# Altium PCB PlanerInductor.PcbDoc (part 2 of 2)
Units mil, origin at the board's own origin, x right, y up, seen from the top; angles counter-clockwise.
Board outline 3000 x 3000 mil, 4 copper layers (Top Layer, Mid-Layer 1, Mid-Layer 2, Bottom Layer); 105 components, 0 nets, 210 pads, 66 vias.
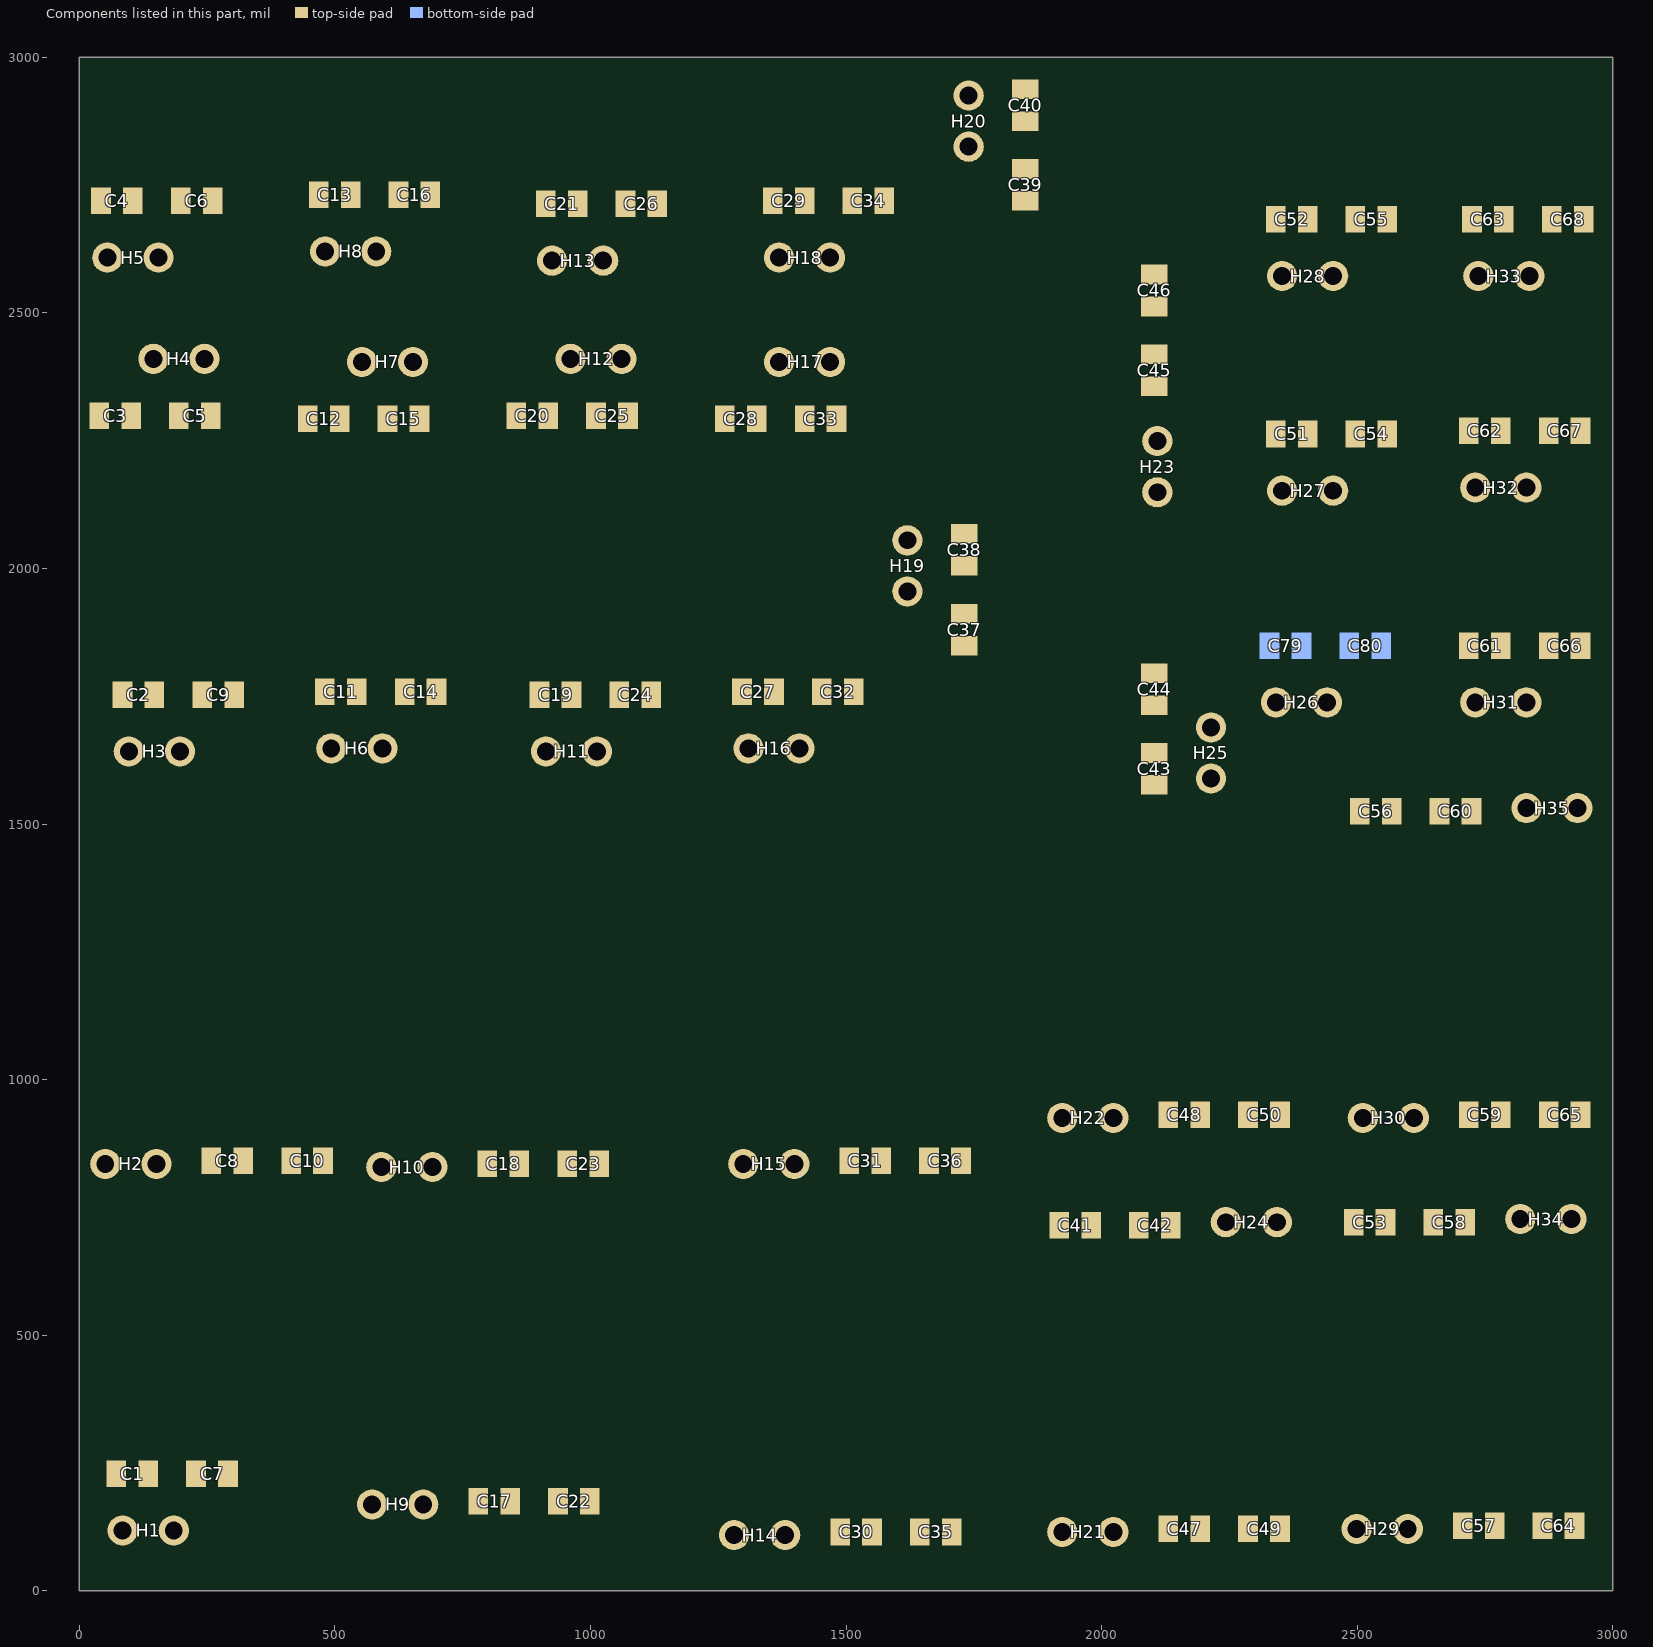
[diagram p4: the components of this part, seen from the top]

## Via types
v1: diameter 25, hole 8, Top Layer to Bottom Layer, 66 vias

## Nets (pads, with @x,y where several pads share a name; then routed paths per layer and width w, separated by ;. In a path a pad name is that pad's centre, name@x,y a point inside that pad or via, vN(x,y) a via of type N, cw(c..) or ccw(c..) an arc to the next point about the centre after c; other vN are vias at no path point) (continued)
copper on no net: | length 670792.9
  Top Layer w6: 27,283 27,313 27,631 345,631 345,313 39,313 39,619 333,619 333,325 51,325 51,607 321,607 321,337 63,337 63,595 309,595 309,349 75,349 75,583 297,583 297,361 87,361 87,571 285,571 285,373 99,373 99,559 273,559 273,385 111,385 111,403 v1(129,403) ; 27,289 27,275 37,265 171,265 177,271 ; v1@234,1096 234,1069 393,1069 393,1285 177,1285 177,1057 405,1057 405,1297 165,1297 165,1045 417,1045 417,1309 153,1309 153,1033 429,1033 429,1321 141,1321 141,1021 441,1021 441,1333 129,1333 129,1009 453,1009 453,1345 117,1345 117,997 465,997 465,1357 105,1357 105,985 477,985 477,1369 93,1369 93,973 489,973 489,1381 81,1381 81,961 501,961 501,1393 69,1393 69,937 117,889 273,889 321,841 ; v1@753,1098 753,1069 915,1069 915,1285 699,1285 699,1057 927,1057 927,1297 687,1297 687,1045 939,1045 939,1309 675,1309 675,1033 951,1033 951,1321 663,1321 663,1021 963,1021 963,1333 651,1333 651,1009 975,1009 975,1345 639,1345 639,997 987,997 987,1357 627,1357 627,985 999,985 999,1369 615,1369 615,973 1011,973 1011,1381 603,1381 603,961 1023,961 1023,1393 591,1393 591,961 591,919 627,883 813,883 861,835 ; v1(785,421) 759,421 759,397 837,397 837,487 747,487 747,385 849,385 849,499 735,499 735,373 861,373 861,511 723,511 723,361 873,361 873,523 711,523 711,349 885,349 885,535 699,535 699,337 897,337 897,547 687,547 687,325 909,325 909,559 675,559 675,313 921,313 921,571 663,571 663,301 933,301 933,583 651,583 651,289 945,289 945,595 639,595 639,277 957,277 957,607 627,607 627,265 969,265 969,619 615,619 615,253 981,253 981,631 603,631 603,625 603,253 603,217 615,205 637,205 645,205 657,217 801,217 843,175 ; v1(1455,336) 1455,307 1611,307 1611,523 1395,523 1395,295 1623,295 1623,535 1383,535 1383,283 1635,283 1635,547 1371,547 1371,271 1647,271 1647,559 1359,559 1359,259 1659,259 1659,571 1347,571 1347,247 1671,247 1671,583 1335,583 1335,235 1683,235 1683,595 1323,595 1323,223 1695,223 1695,607 1311,607 1311,211 1707,211 1707,619 1299,619 1299,199 1719,199 1719,631 1287,631 1287,199 1287,160 1298,149 1535,149 1551,133 1551,115 ; v1@1465,1097 1465,1069 1617,1069 1617,1285 1401,1285 1401,1057 1629,1057 1629,1297 1389,1297 1389,1045 1641,1045 1641,1309 1377,1309 1377,1033 1653,1033 1653,1321 1365,1321 1365,1021 1665,1021 1665,1333 1353,1333 1353,1009 1677,1009 1677,1345 1341,1345 1341,997 1689,997 1689,1357 1329,1357 1329,985 1701,985 1701,1369 1317,1369 1317,973 1713,973 1713,1381 1305,1381 1305,961 1725,961 1725,1393 1293,1393 1293,961 1293,913 1317,889 1533,889 1569,853 1569,841 ; v1(2073,661) 2073,715 2073,697 ; v1(2105,342) 2105,313 2253,313 2253,529 2037,529 2037,301 2265,301 2265,541 2025,541 2025,289 2277,289 2277,553 2013,553 2013,277 2289,277 2289,565 2001,565 2001,265 2301,265 2301,577 1989,577 1989,253 2313,253 2313,589 1977,589 1977,241 2325,241 2325,601 1965,601 1965,229 2337,229 2337,613 1953,613 1953,217 2349,217 2349,625 1941,625 1941,205 2361,205 2361,637 1929,637 1929,205 1929,181 1947,163 2169,163 2193,139 2193,121 ; v1(2649,667) 2649,721 2649,703 ; v1@2655,352 2655,319 2829,319 2829,535 2613,535 2613,307 2841,307 2841,547 2601,547 2601,295 2853,295 2853,559 2589,559 2589,283 2865,283 2865,571 2577,571 2577,271 2877,271 2877,583 2565,583 2565,259 2889,259 2889,595 2553,595 2553,247 2901,247 2901,607 2541,607 2541,235 2913,235 2913,619 2529,619 2529,223 2925,223 2925,631 2517,631 2517,211 2937,211 2937,643 2505,643 2505,211 2505,187 2523,169 2745,169 2769,145 2769,127 ; v1(2661,1471) 2661,1525 2661,1507 ; v1@2749,1201 2769,1201 2769,1267 2697,1267 2697,1183 2781,1183 2781,1279 2685,1279 2685,1171 2793,1171 2793,1291 2673,1291 2673,1159 2805,1159 2805,1303 2661,1303 2661,1147 2817,1147 2817,1315 2649,1315 2649,1309 2649,1135 2829,1135 2829,1327 2637,1327 2637,1123 2667,1123 2841,1123 2841,1339 2625,1339 2625,1111 2853,1111 2853,1351 2613,1351 2613,1099 2865,1099 2865,1363 2601,1363 2601,1087 2877,1087 2877,1375 2589,1375 2589,1075 2889,1075 2889,1387 2577,1387 2577,1063 2901,1063 2901,1399 2565,1399 2565,1051 2913,1051 2913,1411 2553,1411 2553,1039 2925,1039 2925,1423 2541,1423 2541,1027 2937,1027 2937,1435 2529,1435 2529,1015 2949,1015 2949,1447 2517,1447 2517,1015 2517,991 2535,973 2757,973 2781,949 2781,931
  Top Layer w7: 39,2299 39,2281.5 72,2248.5 ; 42.5,2719 55,2706.5 55,2608 ; 51,835 111,775 225,775 348.5,775 414.5,841 ; 84.5,1753 97,1740.5 97,1642 ; 85,118 72.5,130.5 72.5,229 85,216.5 ; 101.5,2299 101.5,2366.5 145,2410 130,2425 ; 105,2719 135,2719 185.5,2769.5 228,2769.5 ; v1@116,2869 115,2858 115,2843 88,2843 88,2857 88,2892 172,2892 172,2829 74,2829 74,2906 186,2906 186,2815 60,2815 60,2920 200,2920 200,2801 46,2801 46,2934 214,2934 214,2787 32,2787 32,2948 172,2948 221,2948 228,2948 228,2785 228,2769.5 ; 135,229 177,271 273,271 291,253 291,229 291,246.5 ; 147,1753 177,1753 227.5,1803.5 270,1803.5 ; 151,835 252.5,835 258.5,841 271,828.5 ; v1(151,1898) 151,1877 130,1877 130,1891 130,1926 214,1926 214,1863 116,1863 116,1940 228,1940 228,1849 102,1849 102,1954 242,1954 242,1835 88,1835 88,1968 256,1968 256,1821 74,1821 74,1982 214,1982 263,1982 270,1982 270,1819 270,1803.5 ; 170,2593 155,2608 198.5,2651.5 198.5,2719 ; v1(191,2154) 191,2175 212,2175 212,2161 212,2126 128,2126 128,2189 226,2189 226,2112 114,2112 114,2203 240,2203 240,2098 100,2098 100,2217 254,2217 254,2084 86,2084 86,2231 268,2231 268,2070 128,2070 79,2070 72,2070 72,2233 72,2248.5 ; 195,2299 165,2299 114.5,2248.5 72,2248.5 ; 200,103 185,118 228.5,161.5 228.5,229 ; 212,1627 197,1642 240.5,1685.5 240.5,1753 ; 245,2410 245,2311.5 257.5,2299 ; 261,2719 261,2736.5 228,2769.5 ; 303,1753 303,1770.5 270,1803.5 ; 321,841 351,841 393,883 447,883 ; 434,2300.5 477,2257.5 477,2245 ; 447,2275.5 447,2293 ; 448,881.5 490,839.5 ; 468.5,2731 481,2718.5 481,2620 ; 477,841 477,858.5 ; 480.5,1759 493,1746.5 493,1648 ; 509.5,2293 509.5,2360.5 553,2404 538,2419 ; 531,2731 561,2731 603,2773 657,2773 657,2830 657,2954 650,2954 601,2954 461,2954 461,2793 643,2793 643,2940 475,2940 475,2807 629,2807 629,2926 489,2926 489,2821 615,2821 615,2912 503,2912 503,2835 601,2835 601,2898 517,2898 517,2863 517,2849 538,2849 v1(538,2870) ; 543,1759 573,1759 621,1807 669,1807 ; v1@550,1898 550,1877 529,1877 529,1891 529,1926 613,1926 613,1863 515,1863 515,1940 627,1940 627,1849 501,1849 501,1954 641,1954 641,1835 487,1835 487,1968 655,1968 655,1821 473,1821 473,1982 613,1982 662,1982 669,1982 669,1858 669,1807 ; 573,169 633,109 747,109 870.5,109 936.5,175 ; 591,829 651,769 765,769 888.5,769 954.5,835 ; v1(596,2154) 596,2175 617,2175 617,2161 617,2126 533,2126 533,2189 631,2189 631,2112 519,2112 519,2203 645,2203 645,2098 505,2098 505,2217 659,2217 659,2084 491,2084 491,2231 673,2231 673,2070 533,2070 484,2070 477,2070 477,2194 477,2245 ; 596,2605 581,2620 624.5,2663.5 624.5,2731 ; 603,2293 573,2293 525,2245 477,2245 ; 608,1633 593,1648 636.5,1691.5 636.5,1759 ; 653,2404 653,2305.5 665.5,2293 ; 658,2765.5 700,2723.5 ; 673,169 774.5,169 780.5,175 793,162.5 ; 687,2731 687,2748.5 ; 691,829 792.5,829 798.5,835 811,822.5 ; 699,1759 699,1776.5 ; 712,1751.5 669,1794.5 669,1807 ; 843,175 873,175 915,217 969,217 ; 855,2299 855,2281.5 888,2248.5 ; 861,835 891,835 933,877 987,877 ; 900.5,1753 913,1740.5 913,1642 ; 912.5,2713 925,2700.5 925,2602 ; 917.5,2299 917.5,2366.5 961,2410 946,2425 ; 963,1753 993,1753 1043.5,1803.5 1086,1803.5 ; v1(967,1898) 967,1877 946,1877 946,1891 946,1926 1030,1926 1030,1863 932,1863 932,1940 1044,1940 1044,1849 918,1849 918,1954 1058,1954 1058,1835 904,1835 904,1968 1072,1968 1072,1821 890,1821 890,1982 1030,1982 1079,1982 1086,1982 1086,1819 1086,1803.5 ; 970,215.5 1012,173.5 ; 975,2713 1005,2713 1055.5,2763.5 1098,2763.5 ; 988,875.5 1030,833.5 ; v1(988,2858) 988,2837 958,2837 958,2851 958,2886 1042,2886 1042,2823 944,2823 944,2900 1056,2900 1056,2809 930,2809 930,2914 1070,2914 1070,2795 916,2795 916,2928 1084,2928 1084,2781 902,2781 902,2942 1042,2942 1091,2942 1098,2942 1098,2779 1098,2763.5 ; 999,175 999,192.5 ; v1(1007,2154) 1007,2175 1028,2175 1028,2161 1028,2126 944,2126 944,2189 1042,2189 1042,2112 930,2112 930,2203 1056,2203 1056,2098 916,2098 916,2217 1070,2217 1070,2084 902,2084 902,2231 1084,2231 1084,2070 944,2070 895,2070 888,2070 888,2233 888,2248.5 ; 1011,2299 981,2299 930.5,2248.5 888,2248.5 ; 1017,835 1017,852.5 ; 1028,1627 1013,1642 1056.5,1685.5 1056.5,1753 ; 1040,2587 1025,2602 1068.5,2645.5 1068.5,2713 ; 1061,2410 1061,2311.5 1073.5,2299 ; 1119,1753 1119,1770.5 1086,1803.5 ; 1131,2713 1131,2730.5 1098,2763.5 ; 1250,2300.5 1293,2257.5 1293,2245 ; 1263,2275.5 1263,2293 ; 1281,109 1341,49 1455,49 1578.5,49 1644.5,115 ; 1296.5,1759 1309,1746.5 1309,1648 ; 1299,835 1359,775 1473,775 1596.5,775 1662.5,841 ; 1325.5,2293 1325.5,2360.5 1369,2404 1354,2419 ; 1356.5,2719 1369,2706.5 1369,2608 ; 1359,1759 1389,1759 1437,1807 1485,1807 ; v1@1366,1898 1366,1877 1345,1877 1345,1891 1345,1926 1429,1926 1429,1863 1331,1863 1331,1940 1443,1940 1443,1849 1317,1849 1317,1954 1457,1954 1457,1835 1303,1835 1303,1968 1471,1968 1471,1821 1289,1821 1289,1982 1429,1982 1478,1982 1485,1982 1485,1858 1485,1807 ; 1381,109 1482.5,109 1488.5,115 1501,102.5 ; 1399,835 1500.5,835 1506.5,841 1519,828.5 ; v1(1412,2154) 1412,2175 1433,2175 1433,2161 1433,2126 1349,2126 1349,2189 1447,2189 1447,2112 1335,2112 1335,2203 1461,2203 1461,2098 1321,2098 1321,2217 1475,2217 1475,2084 1307,2084 1307,2231 1489,2231 1489,2070 1349,2070 1300,2070 1293,2070 1293,2194 1293,2245 ; 1419,2293 1389,2293 1341,2245 1293,2245 ; 1419,2719 1449,2719 1497,2767 1545,2767 ; 1424,1633 1409,1648 1452.5,1691.5 1452.5,1759 ; v1(1426,2858) 1426,2837 1405,2837 1405,2851 1405,2886 1489,2886 1489,2823 1391,2823 1391,2900 1503,2900 1503,2809 1377,2809 1377,2914 1517,2914 1517,2795 1363,2795 1363,2928 1531,2928 1531,2781 1349,2781 1349,2942 1489,2942 1538,2942 1545,2942 1545,2818 1545,2767 ; 1469,2404 1469,2305.5 1481.5,2293 ; 1484,2593 1469,2608 1512.5,2651.5 1512.5,2719 ; 1515,1759 1515,1776.5 ; 1528,1751.5 1485,1794.5 1485,1807 ; 1551,115 1581,115 1623,157 1677,157 ; 1569,841 1599,841 1641,883 1695,883 ; 1575,2719 1575,2736.5 ; 1588,2711.5 1545,2754.5 1545,2767 ; 1605,1940 1620,1955 1663.5,1911.5 1731,1911.5 ; 1620,2055 1718.5,2055 1731,2067.5 ; 1678,155.5 1720,113.5 ; 1696,881.5 1738,839.5 ; 1707,115 1707,132.5 ; 1725,841 1725,858.5 ; 1725,2810 1740,2825 1783.5,2781.5 1851,2781.5 ; 1731,1849 1748.5,1849 1781.5,1882 ; 1731,2005 1731,1975 1781.5,1924.5 1781.5,1882 ; 1740,2925 1838.5,2925 1851,2937.5 ; 1843.5,2706 1886.5,2749 1887,2749.5 1887,2809 1851,2845 1851,2875 ; v1(1850,2348) 1871,2348 1871,2327 1822,2327 1822,2411 1885,2411 1885,2313 1808,2313 1808,2425 1899,2425 1899,2299 1794,2299 1794,2439 1913,2439 1913,2285 1780,2285 1780,2453 1927,2453 1927,2271 1766,2271 1766,2467 1941,2467 1941,2257 1752,2257 1752,2481 1955,2481 1955,2243 1738,2243 1738,2495 1969,2495 1969,2229 1724,2229 1724,2509 1983,2509 1983,2215 1710,2215 1710,2523 1997,2523 1997,2201 1696,2201 1696,2537 2011,2537 2011,2187 1682,2187 1682,2551 2025,2551 2025,2173 1668,2173 1668,2565 2039,2565 2039,2159 1654,2159 1654,2579 2103,2579 ; 1851,2719 1868.5,2719 ; 1853,2721 2147,2721 2147,2966 1902,2966 1902,2735 2133,2735 2133,2952 1916,2952 1916,2749 2119,2749 2119,2938 1930,2938 1930,2763 2105,2763 2105,2924 1944,2924 1944,2777 2091,2777 2091,2910 1958,2910 1958,2791 2077,2791 2077,2896 1972,2896 1972,2805 2063,2805 2063,2882 1986,2882 1986,2819 2015,2819 2025,2829 v1(2025,2828) ; v1(1876,2001) 1855,2001 1855,2022 1869,2022 1904,2022 1904,1938 1841,1938 1841,2036 1918,2036 1918,1924 1827,1924 1827,2050 1932,2050 1932,1910 1813,1910 1813,2064 1946,2064 1946,1896 1799,1896 1799,2078 1960,2078 1960,1938 1960,1889 1960,1882 1797,1882 1781.5,1882 ; 1904,716.5 1946,674.5 ; v1@1911,1678 1911,1691.5 1922,1691.5 1962,1691.5 1962,1628.5 1885,1628.5 1885,1705.5 1976,1705.5 1976,1614.5 1871,1614.5 1871,1719.5 1990,1719.5 1990,1600.5 1857,1600.5 1857,1733.5 2004,1733.5 2004,1586.5 1843,1586.5 1843,1747.5 2018,1747.5 2018,1572.5 1829,1572.5 1829,1761.5 2032,1761.5 2032,1558.5 1815,1558.5 1815,1775.5 2046,1775.5 2046,1544.5 1801,1544.5 1801,1789.5 2095,1789.5 ; 1917,697.5 1917,715 ; 1923,115 1983,55 2097,55 2220.5,55 2286.5,121 ; 1923,925 1983,865 2097,865 2220.5,865 2286.5,931 ; 1947,673 2001,673 2043,715 2073,715 ; 1979.5,715 2045.5,781 2169,781 2283,781 2343,721 ; 2023,115 2124.5,115 2130.5,121 2143,108.5 ; 2023,925 2124.5,925 2130.5,931 2143,918.5 ; 2061,2545 2061,2491 2103,2449 2103,2419 ; 2062.5,2546 2104.5,2588 ; 2085.5,1795 2103,1795 ; 2085.5,2575 2103,2575 ; 2103,1576.5 2115.5,1589 2214,1589 ; 2103,1639 2103,1669 2067.5,1704.5 2067.5,1765 2110.5,1808 ; 2103,1732.5 2170.5,1732.5 2214,1689 2229,1704 ; 2103,2512.5 2169,2446.5 2169,2323 2169,2209 2109,2149 ; 2109,2249 2109,2350.5 2103,2356.5 2115.5,2369 ; v1(2122,1190) 2122,1169 2101,1169 2101,1218 2185,1218 2185,1155 2087,1155 2087,1232 2199,1232 2199,1141 2073,1141 2073,1246 2213,1246 2213,1127 2059,1127 2059,1260 2227,1260 2227,1113 2045,1113 2045,1274 2241,1274 2241,1099 2031,1099 2031,1288 2255,1288 2255,1085 2017,1085 2017,1302 2269,1302 2269,1071 2003,1071 2003,1316 2283,1316 2283,1057 1989,1057 1989,1330 2297,1330 2297,1043 1975,1043 1975,1344 2311,1344 2311,1029 1961,1029 1961,1358 2325,1358 2325,1015 1947,1015 1947,1372 2339,1372 2339,1001 1933,1001 1933,1386 2353,1386 2353,981 ; 2123,727.5 2135.5,715 2141.5,721 2243,721 ; 2193,121 2223,121 2265,163 2319,163 ; 2193,931 2223,931 2265,973 2319,973 ; 2320,161.5 2362,119.5 ; 2320,971.5 2362,929.5 ; 2340.5,2263 2353,2250.5 2353,2152 ; 2340.5,2683 2353,2670.5 2353,2572 ; 2349,121 2349,138.5 ; 2349,948.5 2349,931 2353,935 2353,985 ; 2403,2263 2433,2263 2483.5,2313.5 2526,2313.5 ; 2403,2683 2433,2683 2483.5,2733.5 2526,2733.5 ; v1(2415,2410) 2415,2387 2386,2387 2386,2401 2386,2436 2470,2436 2470,2373 2372,2373 2372,2450 2484,2450 2484,2359 2358,2359 2358,2464 2498,2464 2498,2345 2344,2345 2344,2478 2512,2478 2512,2331 2330,2331 2330,2492 2470,2492 2519,2492 2526,2492 2526,2329 2526,2313.5 ; v1(2420,2832) 2420,2820 2407,2807 2386,2807 2386,2821 2386,2856 2470,2856 2470,2793 2372,2793 2372,2870 2484,2870 2484,2779 2358,2779 2358,2884 2498,2884 2498,2765 2344,2765 2344,2898 2512,2898 2512,2751 2330,2751 2330,2912 2470,2912 2519,2912 2526,2912 2526,2749 2526,2733.5 ; 2468,2137 2453,2152 2496.5,2195.5 2496.5,2263 ; 2468,2557 2453,2572 2496.5,2615.5 2496.5,2683 ; 2480,722.5 2522,680.5 ; 2492,1526.5 2534,1484.5 ; 2493,703.5 2493,721 ; 2499,121 2559,61 2673,61 2796.5,61 2862.5,127 ; 2505,1507.5 2505,1525 ; 2511,925 2571,865 2685,865 2808.5,865 2874.5,931 ; 2523,679 2577,679 2619,721 2649,721 ; 2535,1483 2589,1483 2631,1525 2661,1525 ; 2555.5,721 2621.5,787 2745,787 2859,787 2919,727 ; 2559,2263 2559,2280.5 2526,2313.5 ; 2559,2683 2559,2700.5 2526,2733.5 ; 2567.5,1525 2633.5,1591 2757,1591 2871,1591 2931,1531 ; 2599,121 2700.5,121 2706.5,127 2719,114.5 ; 2611,925 2712.5,925 2718.5,931 2731,918.5 ; 2699,733.5 2711.5,721 2717.5,727 2819,727 ; 2711,1537.5 2723.5,1525 2729.5,1531 2831,1531 ; 2718.5,1849 2731,1836.5 2731,1738 ; 2718.5,2269 2731,2256.5 2731,2158 ; 2724.5,2683 2737,2670.5 2737,2572 ; 2769,127 2799,127 2841,169 2895,169 ; 2781,931 2811,931 2853,973 2907,973 ; 2781,1849 2811,1849 2861.5,1899.5 2904,1899.5 ; 2781,2269 2811,2269 2861.5,2319.5 2904,2319.5 ; v1(2785,1994) 2785,1973 2764,1973 2764,1987 2764,2022 2848,2022 2848,1959 2750,1959 2750,2036 2862,2036 2862,1945 2736,1945 2736,2050 2876,2050 2876,1931 2722,1931 2722,2064 2890,2064 2890,1917 2708,1917 2708,2078 2848,2078 2897,2078 2904,2078 2904,1915 2904,1899.5 ; v1(2785,2414) 2785,2393 2764,2393 2764,2407 2764,2442 2848,2442 2848,2379 2750,2379 2750,2456 2862,2456 2862,2365 2736,2365 2736,2470 2876,2470 2876,2351 2722,2351 2722,2484 2890,2484 2890,2337 2708,2337 2708,2498 2848,2498 2897,2498 2904,2498 2904,2335 2904,2319.5 ; 2787,2683 2817,2683 2867.5,2733.5 2910,2733.5 ; v1(2791,2828) 2791,2807 2770,2807 2770,2821 2770,2856 2854,2856 2854,2793 2756,2793 2756,2870 2868,2870 2868,2779 2742,2779 2742,2884 2882,2884 2882,2765 2728,2765 2728,2898 2896,2898 2896,2751 2714,2751 2714,2912 2854,2912 2903,2912 2910,2912 2910,2749 2910,2733.5 ; 2846,1723 2831,1738 2874.5,1781.5 2874.5,1849 ; 2846,2143 2831,2158 2874.5,2201.5 2874.5,2269 ; 2852,2557 2837,2572 2880.5,2615.5 2880.5,2683 ; 2896,167.5 2938,125.5 ; 2908,971.5 2950,929.5 ; 2925,127 2925,144.5 ; 2937,931 2937,948.5 ; 2937,1849 2937,1866.5 2904,1899.5 ; 2937,2269 2937,2286.5 2904,2319.5 ; 2943,2683 2943,2700.5 2910,2733.5
  Mid-Layer 1 w6: v1(51,289) 51,301 345,301 345,313 345,631 39,631 39,313 333,313 333,619 51,619 51,325 321,325 321,607 63,607 63,601 63,337 309,337 309,595 75,595 75,349 297,349 297,583 87,583 87,361 285,361 285,571 99,571 99,565 99,373 273,373 273,559 111,559 111,403 v1(129,403) ; v1@95,939 95,961 501,961 501,1393 69,1393 69,973 489,973 489,1381 81,1381 81,985 477,985 477,1369 93,1369 93,997 465,997 465,1357 105,1357 105,1009 453,1009 453,1345 117,1345 117,1021 441,1021 441,1333 129,1333 129,1033 429,1033 429,1321 141,1321 141,1045 417,1045 417,1309 153,1309 153,1057 405,1057 405,1297 165,1297 165,1069 393,1069 393,1285 177,1285 177,1096 v1(233,1096) ; v1@616,937 616,961 1023,961 1023,1393 591,1393 591,973 1011,973 1011,1381 603,1381 603,985 999,985 999,1369 615,1369 615,997 987,997 987,1357 627,1357 627,1009 975,1009 975,1345 639,1345 639,1021 963,1021 963,1333 651,1333 651,1033 951,1033 951,1321 663,1321 663,1045 939,1045 939,1309 675,1309 675,1057 927,1057 927,1297 687,1297 687,1069 915,1069 915,1285 699,1285 699,1098 v1(754,1098) ; v1(627,229) 627,241 981,241 981,619 615,619 615,253 969,253 969,607 627,607 627,265 957,265 957,595 639,595 639,277 945,277 945,583 651,583 651,289 933,289 933,571 663,571 663,301 921,301 921,559 675,559 675,313 909,313 909,547 687,547 687,325 897,325 897,535 699,535 699,337 885,337 885,523 711,523 711,349 873,349 873,511 723,511 723,361 861,361 861,499 735,499 735,373 849,373 849,487 747,487 747,385 837,385 837,397 837,475 759,475 759,421 v1(785,421) ; v1@1305,181 1312,188 1312,199 1719,199 1719,631 1287,631 1287,211 1707,211 1707,619 1299,619 1299,223 1695,223 1695,607 1311,607 1311,235 1683,235 1683,595 1323,595 1323,247 1671,247 1671,583 1335,583 1335,259 1659,259 1659,571 1347,571 1347,271 1647,271 1647,559 1359,559 1359,283 1635,283 1635,547 1371,547 1371,295 1623,295 1623,535 1383,535 1383,307 1611,307 1611,523 1395,523 1395,335 v1@1455,335 ; v1@1322,939 1322,961 1725,961 1725,1393 1293,1393 1293,973 1713,973 1713,1381 1305,1381 1305,985 1701,985 1701,1369 1317,1369 1317,997 1689,997 1689,1357 1329,1357 1329,1009 1677,1009 1677,1345 1341,1345 1341,1021 1665,1021 1665,1333 1353,1333 1353,1033 1653,1033 1653,1321 1365,1321 1365,1045 1641,1045 1641,1309 1377,1309 1377,1057 1629,1057 1629,1297 1389,1297 1389,1069 1617,1069 1617,1285 1401,1285 1401,1099 v1@1464,1099 ; 2023,115 2019,115 1947,187 1947,205 2361,205 2361,637 1929,637 1929,217 2349,217 2349,625 1941,625 1941,229 2337,229 2337,613 1953,613 1953,241 2325,241 2325,601 1965,601 1965,253 2313,253 2313,589 1977,589 1977,265 2301,265 2301,577 1989,577 1989,277 2289,277 2289,565 2001,565 2001,289 2277,289 2277,553 2013,553 2013,301 2265,301 2265,541 2025,541 2025,313 2253,313 2253,529 2037,529 2037,341 v1@2105,341 ; 2599,121 2595,121 2523,193 2523,211 2937,211 2937,643 2505,643 2505,223 2925,223 2925,631 2517,631 2517,235 2913,235 2913,619 2529,619 2529,247 2901,247 2901,607 2541,607 2541,259 2889,259 2889,595 2553,595 2553,271 2877,271 2877,583 2565,583 2565,283 2865,283 2865,571 2577,571 2577,295 2853,295 2853,559 2589,559 2589,307 2841,307 2841,547 2601,547 2601,319 2829,319 2829,535 2613,535 2613,352 v1@2655,352 ; 2611,925 2607,925 2535,997 2535,1015 2949,1015 2949,1447 2517,1447 2517,1027 2937,1027 2937,1435 2529,1435 2529,1039 2925,1039 2925,1423 2541,1423 2541,1051 2913,1051 2913,1411 2553,1411 2553,1063 2901,1063 2901,1399 2565,1399 2565,1075 2889,1075 2889,1387 2577,1387 2577,1087 2877,1087 2877,1375 2589,1375 2589,1099 2865,1099 2865,1363 2601,1363 2601,1111 2853,1111 2853,1351 2613,1351 2613,1123 2841,1123 2841,1339 2625,1339 2625,1135 2829,1135 2829,1327 2637,1327 2637,1147 2817,1147 2817,1315 2667,1315 2649,1315 2649,1159 2805,1159 2805,1303 2661,1303 2661,1171 2793,1171 2793,1291 2673,1291 2673,1183 2781,1183 2781,1279 2685,1279 2685,1195 2740,1195 v1(2749,1204)
  Mid-Layer 1 w7: 55,2608 55,2656 165,2766 158,2773 32,2773 32,2787 32,2948 228,2948 228,2787 46,2787 46,2934 214,2934 214,2801 60,2801 60,2920 200,2920 200,2815 74,2815 74,2906 186,2906 186,2829 88,2829 88,2892 172,2892 172,2843 116,2843 v1@116,2864 ; 97,1642 97,1690 207,1800 200,1807 74,1807 74,1821 74,1982 270,1982 270,1821 88,1821 88,1968 256,1968 256,1835 102,1835 102,1954 242,1954 242,1849 116,1849 116,1940 228,1940 228,1863 130,1863 130,1926 214,1926 214,1877 151,1877 151,1884 v1(151,1898) ; 123,2410 145,2410 ; 155,2608 177,2608 ; 185,118 207,118 ; v1(191,2154) 191,2168 191,2175 128,2175 128,2126 212,2126 212,2189 114,2189 114,2112 226,2112 226,2203 100,2203 100,2098 240,2098 240,2217 86,2217 86,2084 254,2084 254,2231 72,2231 72,2070 268,2070 268,2231 268,2245 142,2245 135,2252 245,2362 245,2410 ; 197,1642 219,1642 ; v1@442,2776 v1@446.75,2776 ; v1@447,2779 461,2779 461,2793 461,2954 657,2954 657,2793 475,2793 475,2940 643,2940 643,2807 489,2807 489,2926 629,2926 629,2821 503,2821 503,2912 615,2912 615,2835 517,2835 517,2898 601,2898 601,2849 538,2849 538,2856 v1(538,2870) ; v1@453,1807 473,1807 473,1821 473,1982 669,1982 669,1821 487,1821 487,1968 655,1968 655,1835 501,1835 501,1954 641,1954 641,1849 515,1849 515,1940 627,1940 627,1863 529,1863 529,1926 613,1926 613,1877 550,1877 550,1884 v1@550,1898 ; 531,2404 553,2404 ; 581,2620 603,2620 ; 593,1648 615,1648 ; v1(596,2154) 596,2168 596,2175 533,2175 533,2126 617,2126 617,2189 519,2189 519,2112 631,2112 631,2203 505,2203 505,2098 645,2098 645,2217 491,2217 491,2084 659,2084 659,2231 477,2231 477,2070 673,2070 673,2231 673,2236 v1(685,2248) ; 913,1642 913,1690 1023,1800 1016,1807 890,1807 890,1821 890,1982 1086,1982 1086,1821 904,1821 904,1968 1072,1968 1072,1835 918,1835 918,1954 1058,1954 1058,1849 932,1849 932,1940 1044,1940 1044,1863 946,1863 946,1926 1030,1926 1030,1877 967,1877 967,1884 v1(967,1898) ; 925,2602 925,2650 1035,2760 1028,2767 902,2767 902,2781 902,2942 1098,2942 1098,2781 916,2781 916,2928 1084,2928 1084,2795 930,2795 930,2914 1070,2914 1070,2809 944,2809 944,2900 1056,2900 1056,2823 958,2823 958,2886 1042,2886 1042,2837 988,2837 988,2844 v1(988,2858) ; 939,2410 961,2410 ; v1(1007,2154) 1007,2168 1007,2175 944,2175 944,2126 1028,2126 1028,2189 930,2189 930,2112 1042,2112 1042,2203 916,2203 916,2098 1056,2098 1056,2217 902,2217 902,2084 1070,2084 1070,2231 888,2231 888,2070 1084,2070 1084,2231 1084,2245 958,2245 951,2252 1061,2362 1061,2410 ; 1013,1642 1035,1642 ; 1025,2602 1047,2602 ; v1(1262,1808) 1263,1807 1289,1807 1289,1821 1289,1982 1485,1982 1485,1821 1303,1821 1303,1968 1471,1968 1471,1835 1317,1835 1317,1954 1457,1954 1457,1849 1331,1849 1331,1940 1443,1940 1443,1863 1345,1863 1345,1926 1429,1926 1429,1877 1366,1877 1366,1884 v1@1366,1898 ; v1(1330,2767) 1349,2767 1349,2781 1349,2942 1545,2942 1545,2781 1363,2781 1363,2928 1531,2928 1531,2795 1377,2795 1377,2914 1517,2914 1517,2809 1391,2809 1391,2900 1503,2900 1503,2823 1405,2823 1405,2886 1489,2886 1489,2837 1426,2837 1426,2844 v1(1426,2858) ; 1347,2404 1369,2404 ; 1409,1648 1431,1648 ; v1(1412,2154) 1412,2168 1412,2175 1349,2175 1349,2126 1433,2126 1433,2189 1335,2189 1335,2112 1447,2112 1447,2203 1321,2203 1321,2098 1461,2098 1461,2217 1307,2217 1307,2084 1475,2084 1475,2231 1293,2231 1293,2070 1489,2070 1489,2231 1489,2245 v1(1509,2245) ; 1469,2608 1491,2608 ; 1620,1933 1620,1955 ; 1620,2055 1668,2055 ; 1665,2055 1719,2001 v1(1876,2001) ; 1740,2803 1740,2825 ; 1740,2925 1838,2827 1869,2827 1887,2845 ; v1(1850,2348) 1871,2348 1871,2411 1822,2411 1822,2327 1885,2327 1885,2425 1808,2425 1808,2313 1899,2313 1899,2439 1794,2439 1794,2299 1913,2299 1913,2453 1780,2453 1780,2285 1927,2285 1927,2467 1766,2467 1766,2271 1941,2271 1941,2481 1752,2481 1752,2257 1955,2257 1955,2495 1738,2495 1738,2243 1969,2243 1969,2509 1724,2509 1724,2229 1983,2229 1983,2523 1710,2523 1710,2215 1997,2215 1997,2537 1696,2537 1696,2201 2011,2201 2011,2551 1682,2551 1682,2187 2025,2187 2025,2565 1668,2565 1668,2173 2039,2173 2039,2509 2053,2509 2067,2495 2067,2371 2109,2329 2109,2249 ; 1888,2845 1888,2966 1902,2966 2147,2966 2147,2735 1902,2735 1902,2952 2133,2952 2133,2749 1916,2749 1916,2938 2119,2938 2119,2763 1930,2763 1930,2924 2105,2924 2105,2777 1944,2777 1944,2910 2091,2910 2091,2791 1958,2791 1958,2896 2077,2896 2077,2805 1972,2805 1972,2882 2063,2882 2063,2819 2034,2819 v1(2025,2828) ; v1(1910,1677) 1906,1681 1906,1691.5 1885,1691.5 1885,1628.5 1976,1628.5 1976,1705.5 1871,1705.5 1871,1614.5 1990,1614.5 1990,1719.5 1857,1719.5 1857,1600.5 2004,1600.5 2004,1733.5 1843,1733.5 1843,1586.5 2018,1586.5 2018,1747.5 1829,1747.5 1829,1572.5 2032,1572.5 2032,1761.5 1815,1761.5 1815,1558.5 2046,1558.5 2046,1775.5 1801,1775.5 1801,1544.5 2046,1544.5 2060,1544.5 2060,1528 v1(2061,1527) ; v1(1913,987) 1933,987 1933,1386 2353,1386 2353,1001 1947,1001 1947,1372 2339,1372 2339,1015 1961,1015 1961,1358 2325,1358 2325,1029 1975,1029 1975,1344 2311,1344 2311,1043 1989,1043 1989,1330 2297,1330 2297,1057 2003,1057 2003,1316 2283,1316 2283,1071 2017,1071 2017,1302 2269,1302 2269,1085 2031,1085 2031,1288 2255,1288 2255,1099 2045,1099 2045,1274 2241,1274 2241,1113 2059,1113 2059,1260 2227,1260 2227,1127 2073,1127 2073,1246 2213,1246 2213,1141 2087,1141 2087,1232 2199,1232 2199,1155 2101,1155 2101,1218 2185,1218 2185,1169 2122,1169 v1(2122,1190) ; 2214,1689 2214,1711 ; 2353,2152 2353,2200 2463,2310 2456,2317 2330,2317 2330,2331 2330,2492 2526,2492 2526,2331 2344,2331 2344,2478 2512,2478 2512,2345 2358,2345 2358,2464 2498,2464 2498,2359 2372,2359 2372,2450 2484,2450 2484,2373 2386,2373 2386,2436 2470,2436 2470,2387 2415,2387 v1(2415,2410) ; 2353,2572 2353,2620 2463,2730 2456,2737 2330,2737 2330,2751 2330,2912 2526,2912 2526,2751 2344,2751 2344,2898 2512,2898 2512,2765 2358,2765 2358,2884 2498,2884 2498,2779 2372,2779 2372,2870 2484,2870 2484,2793 2386,2793 2386,2856 2470,2856 2470,2807 2431,2807 2420,2818 v1(2420,2832) ; 2453,2152 2475,2152 ; 2453,2572 2475,2572 ; 2737,2572 2737,2620 ; 2737,2617 2791,2671 v1(2791,2828) ; 2837,2572 2859,2572
  Mid-Layer 1 w25: 111,2269 45,2269 45,2257 45,2041 63,2041 297,2041 297,2257 285,2269 207,2269 ; 135,1783 57,1783 45,1795 45,2011 279,2011 297,2011 297,1795 297,1783 231,1783 ; 285,931 146,931 117,902 39,902 39,1423 531,1423 531,931 333,931 ; 519,2269 447,2269 447,2041 717,2041 717,2286 615,2286 ; 531,1766 414,1766 414,2011 699,2011 699,1783 627,1783 ; 807,931 658,931 629,902 561,902 561,1423 1053,1423 1053,931 855,931 ; 963,2743 885,2743 873,2755 873,2971 1107,2971 1125,2971 1125,2755 1125,2743 1059,2743 ; 1407,2735 1296,2735 1296,2971 1575,2971 1575,2743 1503,2743 ; 1509,931 1359,931 1337,909 1263,909 1263,1423 1755,1423 1755,931 1557,931
  Mid-Layer 2 w6: v1(51,289) 51,301 27,301 27,313 27,631 345,631 345,313 39,313 39,619 333,619 333,325 51,325 51,607 321,607 321,337 63,337 63,595 309,595 309,349 75,349 75,583 297,583 297,361 87,361 87,571 285,571 285,373 99,373 99,559 273,559 273,385 180,385 v1@180,403 ; v1@95,943 69,943 69,1393 501,1393 501,961 81,961 81,1381 489,1381 489,973 93,973 93,1369 477,1369 477,985 105,985 105,1357 465,1357 465,997 117,997 117,1345 453,1345 453,1009 129,1009 129,1333 441,1333 441,1021 141,1021 141,1321 429,1321 429,1033 153,1033 153,1309 417,1309 417,1045 165,1045 165,1297 405,1297 405,1057 177,1057 177,1285 393,1285 393,1069 206,1069 v1(206,1128) ; v1@618,943 591,943 591,1393 1023,1393 1023,961 603,961 603,1381 1011,1381 1011,973 615,973 615,1369 999,1369 999,985 627,985 627,1357 987,1357 987,997 639,997 639,1345 975,1345 975,1009 651,1009 651,1333 963,1333 963,1021 663,1021 663,1321 951,1321 951,1033 675,1033 675,1309 939,1309 939,1045 687,1045 687,1297 927,1297 927,1057 699,1057 699,1285 915,1285 915,1069 726,1069 v1(726,1133) ; v1(627,229) 627,241 603,241 603,625 603,631 981,631 981,253 615,253 615,619 969,619 969,265 627,265 627,607 957,607 957,277 639,277 639,595 945,595 945,289 651,289 651,583 933,583 933,301 663,301 663,571 921,571 921,313 675,313 675,559 909,559 909,325 687,325 687,547 897,547 897,337 699,337 699,535 885,535 885,349 711,349 711,523 873,523 873,361 723,361 723,511 861,511 861,373 735,373 735,499 849,499 849,385 747,385 747,487 837,487 837,397 810,397 v1@810,446 ; v1@1305,181 1287,181 1287,631 1719,631 1719,199 1299,199 1299,619 1707,619 1707,211 1311,211 1311,607 1695,607 1695,223 1323,223 1323,595 1683,595 1683,235 1335,235 1335,583 1671,583 1671,247 1347,247 1347,571 1659,571 1659,259 1359,259 1359,559 1647,559 1647,271 1371,271 1371,547 1635,547 1635,283 1383,283 1383,535 1623,535 1623,295 1395,295 1395,523 1611,523 1611,307 1424,307 v1@1424,373 ; v1@1323,943 1293,943 1293,1393 1725,1393 1725,961 1305,961 1305,1381 1713,1381 1713,973 1317,973 1317,1369 1701,1369 1701,985 1329,985 1329,1357 1689,1357 1689,997 1341,997 1341,1345 1677,1345 1677,1009 1353,1009 1353,1333 1665,1333 1665,1021 1365,1021 1365,1321 1653,1321 1653,1033 1377,1033 1377,1309 1641,1309 1641,1045 1389,1045 1389,1297 1629,1297 1629,1057 1401,1057 1401,1285 1617,1285 1617,1069 1431,1069 v1@1431,1135 ; v1@2071,381 2071,313 2259,313 2259,529 2043,529 2043,301 2271,301 2271,541 2031,541 2031,289 2283,289 2283,553 2019,553 2019,277 2295,277 2295,565 2007,565 2007,265 2307,265 2307,577 1995,577 1995,253 2319,253 2319,589 1983,589 1983,241 2331,241 2331,601 1971,601 1971,229 2343,229 2343,613 1959,613 1959,217 2355,217 2355,625 1947,625 1947,205 2367,205 2367,637 1935,637 1935,193 2379,193 2379,649 2313,649 ; 2243,721 2315,649
  Mid-Layer 2 w7: v1@442,2779 657,2779 657,2954 461,2954 461,2793 643,2793 643,2940 475,2940 475,2807 629,2807 629,2926 489,2926 489,2821 615,2821 615,2912 503,2912 503,2835 601,2835 601,2898 517,2898 517,2849 579,2849 579,2864 v1@585,2870 ; v1@455,1807 669,1807 669,1982 473,1982 473,1821 655,1821 655,1968 487,1968 487,1835 641,1835 641,1954 501,1954 501,1849 627,1849 627,1940 515,1940 515,1863 613,1863 613,1926 529,1926 529,1877 587,1877 v1(587,1898) ; v1(560,2154) 560,2175 617,2175 617,2126 533,2126 533,2189 631,2189 631,2112 519,2112 519,2203 645,2203 645,2098 505,2098 505,2217 659,2217 659,2084 491,2084 491,2231 673,2231 673,2070 477,2070 477,2245 v1@685,2245 ; v1@1262,1807 1485,1807 1485,1982 1289,1982 1289,1821 1471,1821 1471,1968 1303,1968 1303,1835 1457,1835 1457,1954 1317,1954 1317,1849 1443,1849 1443,1940 1331,1940 1331,1863 1429,1863 1429,1926 1345,1926 1345,1877 1402,1877 v1@1402,1898 ; v1(1330,2767) 1545,2767 1545,2942 1349,2942 1349,2781 1531,2781 1531,2928 1363,2928 1363,2795 1517,2795 1517,2914 1377,2914 1377,2809 1503,2809 1503,2900 1391,2900 1391,2823 1489,2823 1489,2886 1405,2886 1405,2837 1466,2837 v1@1466,2858 ; v1@1371,2154 1371,2175 1433,2175 1433,2126 1349,2126 1349,2189 1447,2189 1447,2112 1335,2112 1335,2203 1461,2203 1461,2098 1321,2098 1321,2217 1475,2217 1475,2084 1307,2084 1307,2231 1489,2231 1489,2070 1293,2070 1293,2245 v1(1509,2245) ; v1(1913,987) 2353,987 2353,1386 1933,1386 1933,1001 2339,1001 2339,1372 1947,1372 1947,1015 2325,1015 2325,1358 1961,1358 1961,1029 2311,1029 2311,1344 1975,1344 1975,1043 2297,1043 2297,1330 1989,1330 1989,1057 2283,1057 2283,1316 2003,1316 2003,1071 2269,1071 2269,1302 2017,1302 2017,1085 2255,1085 2255,1288 2031,1288 2031,1099 2241,1099 2241,1274 2045,1274 2045,1113 2227,1113 2227,1260 2059,1260 2059,1127 2213,1127 2213,1246 2073,1246 2073,1141 2199,1141 2199,1232 2087,1232 2087,1155 2185,1155 2185,1218 2101,1218 2101,1169 2157,1169 2157,1184 v1@2163,1190 ; v1@1941,1653 1962,1653 1962,1628.5 1885,1628.5 1885,1705.5 1976,1705.5 1976,1614.5 1871,1614.5 1871,1719.5 1990,1719.5 1990,1600.5 1857,1600.5 1857,1733.5 2004,1733.5 2004,1586.5 1843,1586.5 1843,1747.5 2018,1747.5 2018,1572.5 1829,1572.5 1829,1761.5 2032,1761.5 2032,1558.5 1815,1558.5 1815,1775.5 2046,1775.5 2046,1544.5 1801,1544.5 1801,1789.5 2060,1789.5 v1@2060,1527 ; 2341,1738 2341,1786 2451,1896 2444,1903 2318,1903 2318,1917 2318,2078 2514,2078 2514,1917 2332,1917 2332,2064 2500,2064 2500,1931 2346,1931 2346,2050 2486,2050 2486,1945 2360,1945 2360,2036 2472,2036 2472,1959 2374,1959 2374,2022 2458,2022 2458,1973 2395,1973 2395,1980 v1(2395,1994) ; 2441,1738 2463,1738 ; 2731,2158 2731,2206 2841,2316 2834,2323 2708,2323 2708,2337 2708,2498 2904,2498 2904,2337 2722,2337 2722,2484 2890,2484 2890,2351 2736,2351 2736,2470 2876,2470 2876,2365 2750,2365 2750,2456 2862,2456 2862,2379 2764,2379 2764,2442 2848,2442 2848,2393 2785,2393 2785,2400 v1(2785,2414) ; 2831,2158 2853,2158
  Mid-Layer 2 w20: v1(2637,505) 2637,523 2595,523 2595,295 2865,295 2865,571 2535,571 2535,241 2907,241 2907,619 2535,619 2535,637 2625,727 2819,727 ; v1(2739,1243) 2739,1285 2721,1285 2649,1285 2649,1141 2829,1141 2829,1327 2649,1327 2607,1327 2607,1099 2877,1099 2877,1375 2547,1375 2547,1045 2919,1045 2919,1423 2547,1423 2547,1441 2637,1531 2831,1531
  Mid-Layer 2 w25: 285,931 146,931 117,902 39,902 39,1423 531,1423 531,931 333,931 ; 807,931 658,931 629,902 561,902 561,1423 1053,1423 1053,931 855,931 ; 1509,931 1359,931 1337,909 1263,909 1263,1423 1755,1423 1755,931 1557,931
  Bottom Layer w6: 85,118 85,301 345,301 345,313 345,631 39,631 39,313 333,313 333,619 51,619 51,325 321,325 321,607 63,607 63,601 63,337 309,337 309,595 75,595 75,349 297,349 297,583 87,583 87,361 285,361 285,571 99,571 99,565 99,373 273,373 273,559 111,559 111,385 179,385 v1@179,411 ; 129,961 501,961 501,1393 69,1393 69,973 489,973 489,1381 81,1381 81,985 477,985 477,1369 93,1369 93,997 465,997 465,1357 105,1357 105,1009 453,1009 453,1345 117,1345 117,1021 441,1021 441,1333 129,1333 129,1033 429,1033 429,1321 141,1321 141,1045 417,1045 417,1309 153,1309 153,1057 405,1057 405,1297 165,1297 165,1069 393,1069 393,1285 177,1285 177,1130 v1@195,1130 ; 673,169 673,183 651,205 651,235 657,241 981,241 981,619 615,619 615,253 969,253 969,607 627,607 627,265 957,265 957,595 639,595 639,277 945,277 945,583 651,583 651,289 933,289 933,571 663,571 663,301 921,301 921,559 675,559 675,313 909,313 909,547 687,547 687,325 897,325 897,535 699,535 699,337 885,337 885,523 711,523 711,349 873,349 873,511 723,511 723,361 861,361 861,499 735,499 735,373 849,373 849,487 747,487 747,385 837,385 837,397 837,475 759,475 759,397 810,397 v1@810,446 ; 691,829 691,897 645,943 645,955 651,961 1023,961 1023,1393 591,1393 591,973 1011,973 1011,1381 603,1381 603,985 999,985 999,1369 615,1369 615,997 987,997 987,1357 627,1357 627,1009 975,1009 975,1345 639,1345 639,1021 963,1021 963,1333 651,1333 651,1033 951,1033 951,1321 663,1321 663,1045 939,1045 939,1309 675,1309 675,1057 927,1057 927,1297 687,1297 687,1069 915,1069 915,1285 699,1285 699,1132 v1@717,1132 ; 1381,109 1341,149 1341,193 1347,199 1719,199 1719,631 1287,631 1287,211 1707,211 1707,619 1299,619 1299,223 1695,223 1695,607 1311,607 1311,235 1683,235 1683,595 1323,595 1323,247 1671,247 1671,583 1335,583 1335,259 1659,259 1659,571 1347,571 1347,271 1647,271 1647,559 1359,559 1359,283 1635,283 1635,547 1371,547 1371,295 1623,295 1623,535 1383,535 1383,307 1611,307 1611,523 1395,523 1395,373 1413,373 ; 1399,835 1399,891 1347,943 1347,955 1353,961 1725,961 1725,1393 1293,1393 1293,973 1713,973 1713,1381 1305,1381 1305,985 1701,985 1701,1369 1317,1369 1317,997 1689,997 1689,1357 1329,1357 1329,1009 1677,1009 1677,1345 1341,1345 1341,1021 1665,1021 1665,1333 1353,1333 1353,1033 1653,1033 1653,1321 1365,1321 1365,1045 1641,1045 1641,1309 1377,1309 1377,1057 1629,1057 1629,1297 1389,1297 1389,1069 1617,1069 1617,1285 1401,1285 1401,1135 v1(1432,1135) ; v1(2072,381) 2043,381 2043,529 2259,529 2259,313 2031,313 2031,541 2271,541 2271,301 2019,301 2019,553 2283,553 2283,289 2007,289 2007,565 2295,565 2295,277 1995,277 1995,577 2307,577 2307,265 1983,265 1983,589 2319,589 2319,253 1971,253 1971,601 2331,601 2331,241 1959,241 1959,613 2343,613 2343,229 1947,229 1947,625 2355,625 2355,217 1935,217 1935,637 2367,637 2367,205 1995,205 1923,205 1923,643 1923,649 2055,649 2067,661 v1(2073,661) ; v1@2649,661 2643,667 v1(2649,667) ; v1@2661,1465 2655,1471 v1(2661,1471)
  Bottom Layer w7: 129,961 123,955 123,943 151,915 151,835 ; 481,2620 587,2726 587,2756.5 587,2776 ; v1(560,2154) 560,2126 617,2126 617,2175 533,2175 533,2112 631,2112 631,2189 519,2189 519,2098 645,2098 645,2203 505,2203 505,2084 659,2084 659,2217 491,2217 491,2070 673,2070 673,2231 564,2231 ; v1(579,2870) 579,2898 517,2898 517,2849 601,2849 601,2912 503,2912 503,2835 615,2835 615,2926 489,2926 489,2821 629,2821 629,2940 475,2940 475,2807 643,2807 643,2954 461,2954 461,2793 570,2793 ; v1(587,1898) 587,1926 529,1926 529,1877 613,1877 613,1940 515,1940 515,1863 627,1863 627,1954 501,1954 501,1849 641,1849 641,1968 487,1968 487,1835 655,1835 655,1982 473,1982 473,1821 582,1821 ; 593,1648 599,1654 599,1784.5 599,1804 ; 653,2404 547,2298 547,2267.5 547,2248 ; 1369,2404 1363,2398 1363,2267.5 1363,2248 ; 1369,2608 1369,2638.5 1475,2744.5 1475,2764 ; v1@1372,2154 1372,2126 1433,2126 1433,2175 1349,2175 1349,2112 1447,2112 1447,2189 1335,2189 1335,2098 1461,2098 1461,2203 1321,2203 1321,2084 1475,2084 1475,2217 1307,2217 1307,2070 1489,2070 1489,2231 1380,2231 ; v1@1402,1898 1402,1926 1345,1926 1345,1877 1429,1877 1429,1940 1331,1940 1331,1863 1443,1863 1443,1954 1317,1954 1317,1849 1457,1849 1457,1968 1303,1968 1303,1835 1471,1835 1471,1982 1289,1982 1289,1821 1398,1821 ; 1409,1648 1415,1654 1415,1784.5 1415,1804 ; v1@1465,2858 1465,2886 1405,2886 1405,2837 1489,2837 1489,2900 1391,2900 1391,2823 1503,2823 1503,2914 1377,2914 1377,2809 1517,2809 1517,2928 1363,2928 1363,2795 1531,2795 1531,2942 1349,2942 1349,2781 1458,2781 ; v1@1941,1653 1962,1653 1962,1705.5 1920,1705.5 1885,1705.5 1885,1628.5 1898.08,1628.5 1976,1628.5 1976,1719.5 1871,1719.5 1871,1614.5 1990,1614.5 1990,1733.5 1857,1733.5 1857,1600.5 2004,1600.5 2004,1747.5 1843,1747.5 1843,1586.5 2018,1586.5 2018,1761.5 1829,1761.5 1829,1572.5 2032,1572.5 2032,1775.5 1815,1775.5 1815,1558.5 2046,1558.5 2046,1711 ; 2023,925 2050,952 2258.5,952 ; 2055,1719.5 2054.5,1719.5 ; v1(2157,1190) 2157,1169 2185,1169 2185,1218 2101,1218 2101,1155 2199,1155 2199,1232 2087,1232 2087,1141 2213,1141 2213,1239 2213,1246 2073,1246 2073,1127 2227,1127 2227,1260 2059,1260 2059,1113 2241,1113 2241,1274 2045,1274 2045,1099 2255,1099 2255,1288 2031,1288 2031,1085 2269,1085 2269,1302 2017,1302 2017,1071 2283,1071 2283,1316 2003,1316 2003,1057 2297,1057 2297,1330 1989,1330 1989,1043 2311,1043 2311,1344 1975,1344 1975,1029 2325,1029 2325,1358 1961,1358 1961,1015 2339,1015 2339,1372 1947,1372 1947,1001 2283,1001 2283,976.5 ; 2214,1589 2103,1700 2090,1700 2070.5,1719.5 2054.5,1719.5 ; 2328.5,1849 2341,1836.5 2341,1738 ; 2391,1849 2421,1849 2471.5,1899.5 2514,1899.5 ; v1(2395,1994) 2395,1973 2374,1973 2374,1987 2374,2022 2458,2022 2458,1959 2360,1959 2360,2036 2472,2036 2472,1945 2346,1945 2346,2050 2486,2050 2486,1931 2332,1931 2332,2064 2500,2064 2500,1917 2318,1917 2318,2078 2458,2078 2507,2078 2514,2078 2514,1915 2514,1899.5 ; 2456,1723 2441,1738 2484.5,1781.5 2484.5,1849 ; 2547,1849 2547,1866.5 2514,1899.5 ; 2731,1738 2731,1786 2841,1896 2834,1903 2708,1903 2708,1917 2708,2078 2904,2078 2904,1917 2722,1917 2722,2064 2890,2064 2890,1931 2736,1931 2736,2050 2876,2050 2876,1945 2750,1945 2750,2036 2862,2036 2862,1959 2764,1959 2764,2022 2848,2022 2848,1973 2785,1973 2785,1980 v1(2785,1994) ; 2831,1738 2853,1738 ; 547,2248 564,2231 ; 547,2248 564,2231 ; 570,2793 587,2776 ; 570,2793 587,2776 ; 582,1821 599,1804 ; 582,1821 599,1804 ; 1363,2248 1380,2231 ; 1363,2248 1380,2231 ; 1398,1821 1415,1804 ; 1398,1821 1415,1804 ; 1458,2781 1475,2764 ; 1458,2781 1475,2764 ; 2046,1711 2054.5,1719.5 ; 2046,1711 2054.5,1719.5 ; 2258.5,952 2283,976.5 ; 2258.5,952 2283,976.5
  Bottom Layer w20: v1(2637,505) 2637,529 2865,529 2865,289 2589,289 2589,571 2697,571 2907,571 2907,241 2535,241 2535,613 2649,613 v1@2649,661 ; v1@2661,1465 2661,1417 2547,1417 2547,1045 2919,1045 2919,1375 2709,1375 2601,1375 2601,1093 2877,1093 2877,1333 2649,1333 2649,1309 2649,1141 2829,1141 2829,1279 2823,1285 2739,1285 v1(2739,1243)
  other v1: 1312,178 2655,353 1426,373 180,411 812,446 618,937 100,939 1323,939 1464,1097 1940,1652 452,1806 552,1898 1367,1899 1402,1899 1372,2153 446,2780 1465,2857 115,2864

## Polygon pours and split planes (outlines as drawn)
no net on Bottom Layer "TopOverlay-No Net" (solid, pour order 6): 2313,2929 2553,2929 2553,2719 2301,2719 2301,2929 2313,2929
no net on Bottom Layer "TopOverlay-No Net" (solid, pour order 5): 2553,2509 2553,2299 2439,2299 2439,2383 2415,2383 2415,2299 2301,2299 2301,2509
no net on Mid-Layer 1 "TopOverlay-No Net" (solid, pour order 7): 1557,2125 1977,2125 1977,1825 1557,1825 1557,2125
no net on Mechanical 1 "TopOverlay-No Net" (none): 0,0 0,3000 3000,3000 3000,0 3001,-1 3000,0 0,0

## Silkscreen, mask and mechanical layers (free items; w line width, h text height)
Top Overlay:
  text "2layers" at 873,2959 h30
  text "4layers" at 1323,2959 h30
  text "2layers" at 2118,2941 h30 r270
  text "4layers" at 461,2931 h30
  text "0.9uH" at 2073,2926 h30 r270
  text "2layers" at 40,2925 h30
  text "0.4uH" at 873,2917 h30
  text "1.6uH" at 1335,2917 h30
  text "2layers" at 2338,2889 h30
  text "1layers" at 2722,2889 h30
  text "1.6uH" at 470,2886 h30
  text "0.4uH" at 60,2880 h30
  text "Shield" at 873,2875 h30
  text "Shield" at 1335,2875 h30
  text "0.4uH" at 2358,2844 h30
  text "0.1uH" at 2742,2844 h30
  text "2layers" at 2716,2475 h30
  text "2layers" at 2338,2469 h30
  text "0.4uH" at 2736,2430 h30
  text "0.4uH" at 2358,2424 h30
  text "4.2uH" at 1779,2296 h30 r90
  text "2layers" at 1724,2271 h30 r90
  text "Shield" at 297,2137 h30 r180
  text "Shield" at 687,2137 h30 r180
  text "0.4uH" at 297,2095 h30 r180
  text "1.6uH" at 687,2095 h30 r180
  text "0.4uH" at 1113,2095 h30 r180
  text "1.6uH" at 1503,2095 h30 r180
  text "1layers" at 1937,2070 h30 r270
  text "2layers" at 2326,2055 h30
  text "2layers" at 2716,2055 h30
  text "2layers" at 297,2053 h30 r180
  text "4layers" at 699,2053 h30 r180
  text "2layers" at 1113,2053 h30 r180
  text "4layers" at 1515,2053 h30 r180
  text "0.1uH" at 1892,2050 h30 r270
  text "0.4uH" at 2346,2010 h30
  text "0.4uH" at 2736,2010 h30
  text "2layers" at 45,1999 h30
  text "4layers" at 447,1999 h30
  text "2layers" at 861,1999 h30
  text "4layers" at 1263,1999 h30
  text "0.4uH" at 45,1957 h30
  text "1.6uH" at 459,1957 h30
  text "0.4uH" at 861,1957 h30
  text "1.6uH" at 1275,1957 h30
  text "Shield" at 45,1915 h30
  text "Shield" at 459,1915 h30
  text "3.7uH" at 1880,1601 h30 r90
  text "4layers" at 1829,1572.5 h30 r90
  text "4layers" at 2644,1371 h30
  text "4layers" at 2058,1321 h30
  text "4layers" at 196,1317 h30
  text "4layers" at 718,1317 h30
  text "4layers" at 1420,1317 h30
  text "?uH" at 2667,1309 h30
  text "16.6uH" at 2068,1274 h30
  text "1:5" at 2685,1261 h30
  text "19.2uH" at 219,1255 h30
  text "19.2uH" at 741,1255 h30
  text "19.2uH" at 1443,1255 h30
  text "Shield" at 219,1207 h30
  text "Shield" at 741,1207 h30
  text "Shield" at 1437,1207 h30
  text "4layers" at 112,585 h30
  text "4layers" at 2632,567 h30
  text "4layers" at 718,561 h30
  text "4layers" at 2056,561 h30
  text "4layers" at 1414,555 h30
  text "7.2uH" at 129,541 h30
  text "16uH" at 735,517 h30
  text "9.7uH" at 2655,505 h30
  text "9.7uH" at 2079,499 h30
  text "19.2uH" at 1437,493 h30
  text "1:5" at 2673,457 h30
  text "1:1" at 2097,451 h30